# Altium PCB Soil_EH_Comparator.PcbDoc
Units mil, origin at the board's own origin, x right, y up, seen from the top; angles counter-clockwise.
Board outline 3210 x 1995 mil, 2 copper layers (Top Layer, Bottom Layer); 68 components, 38 nets, 164 pads, 12 vias.
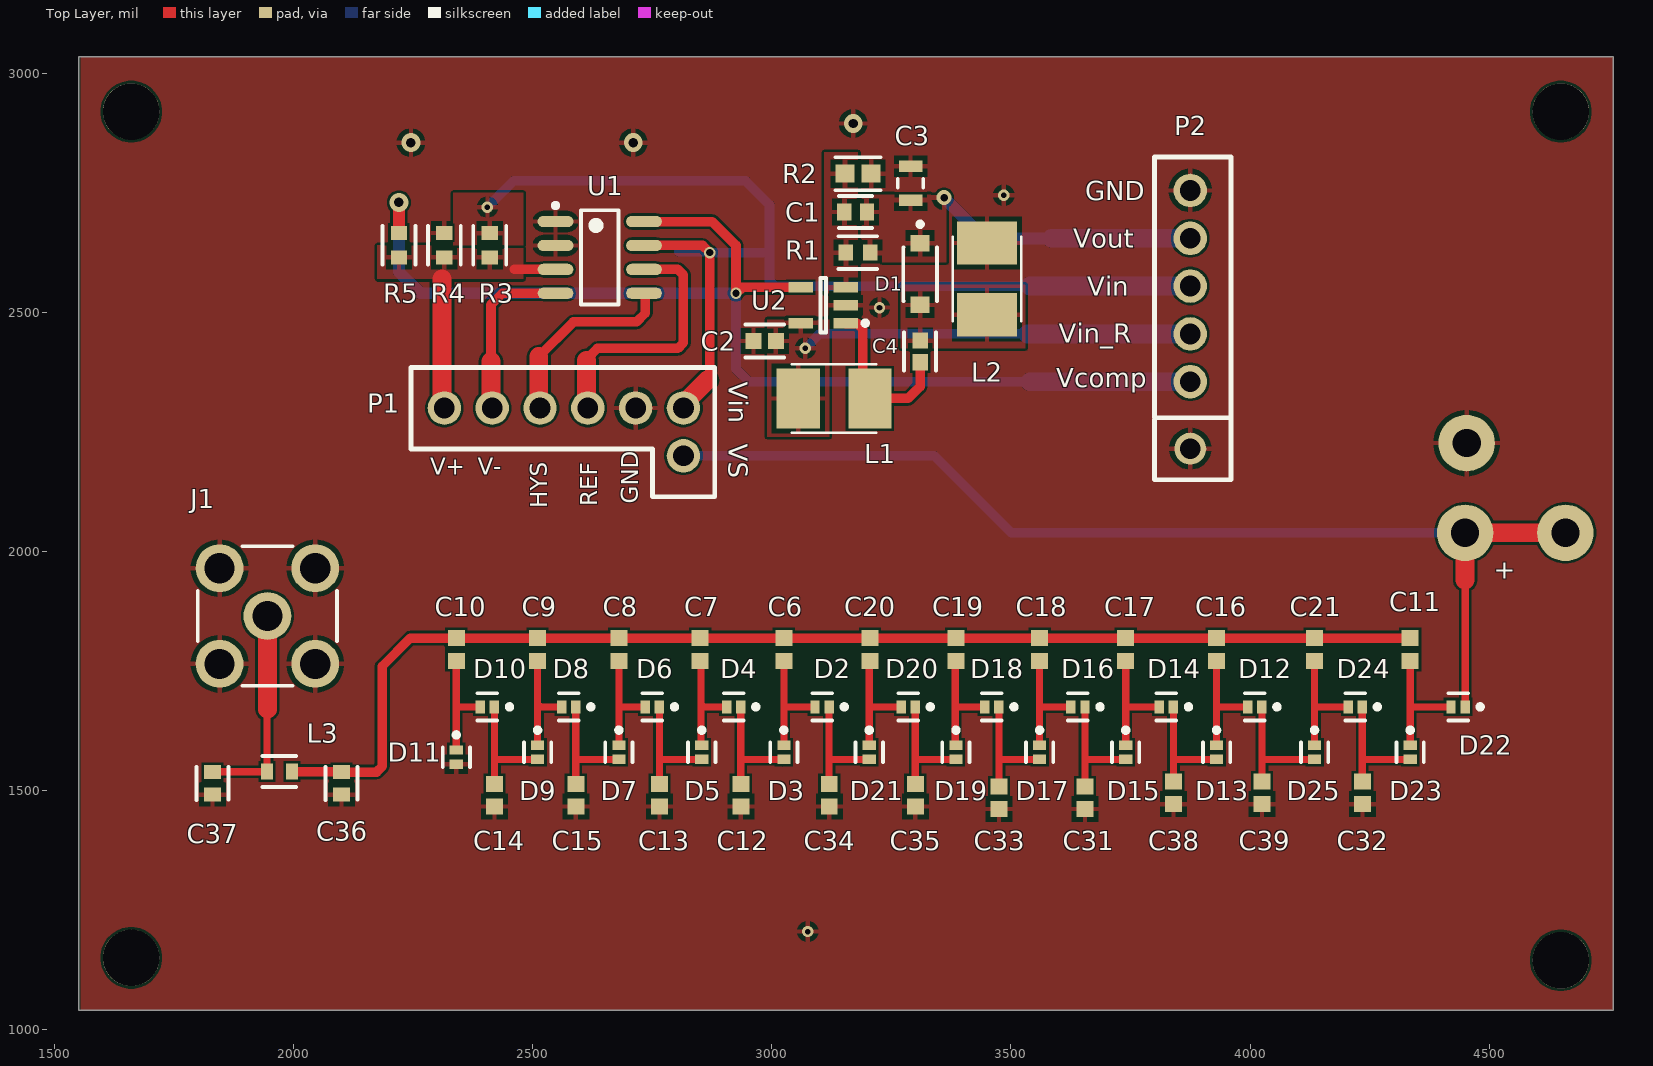
[diagram p0: Top Layer view]
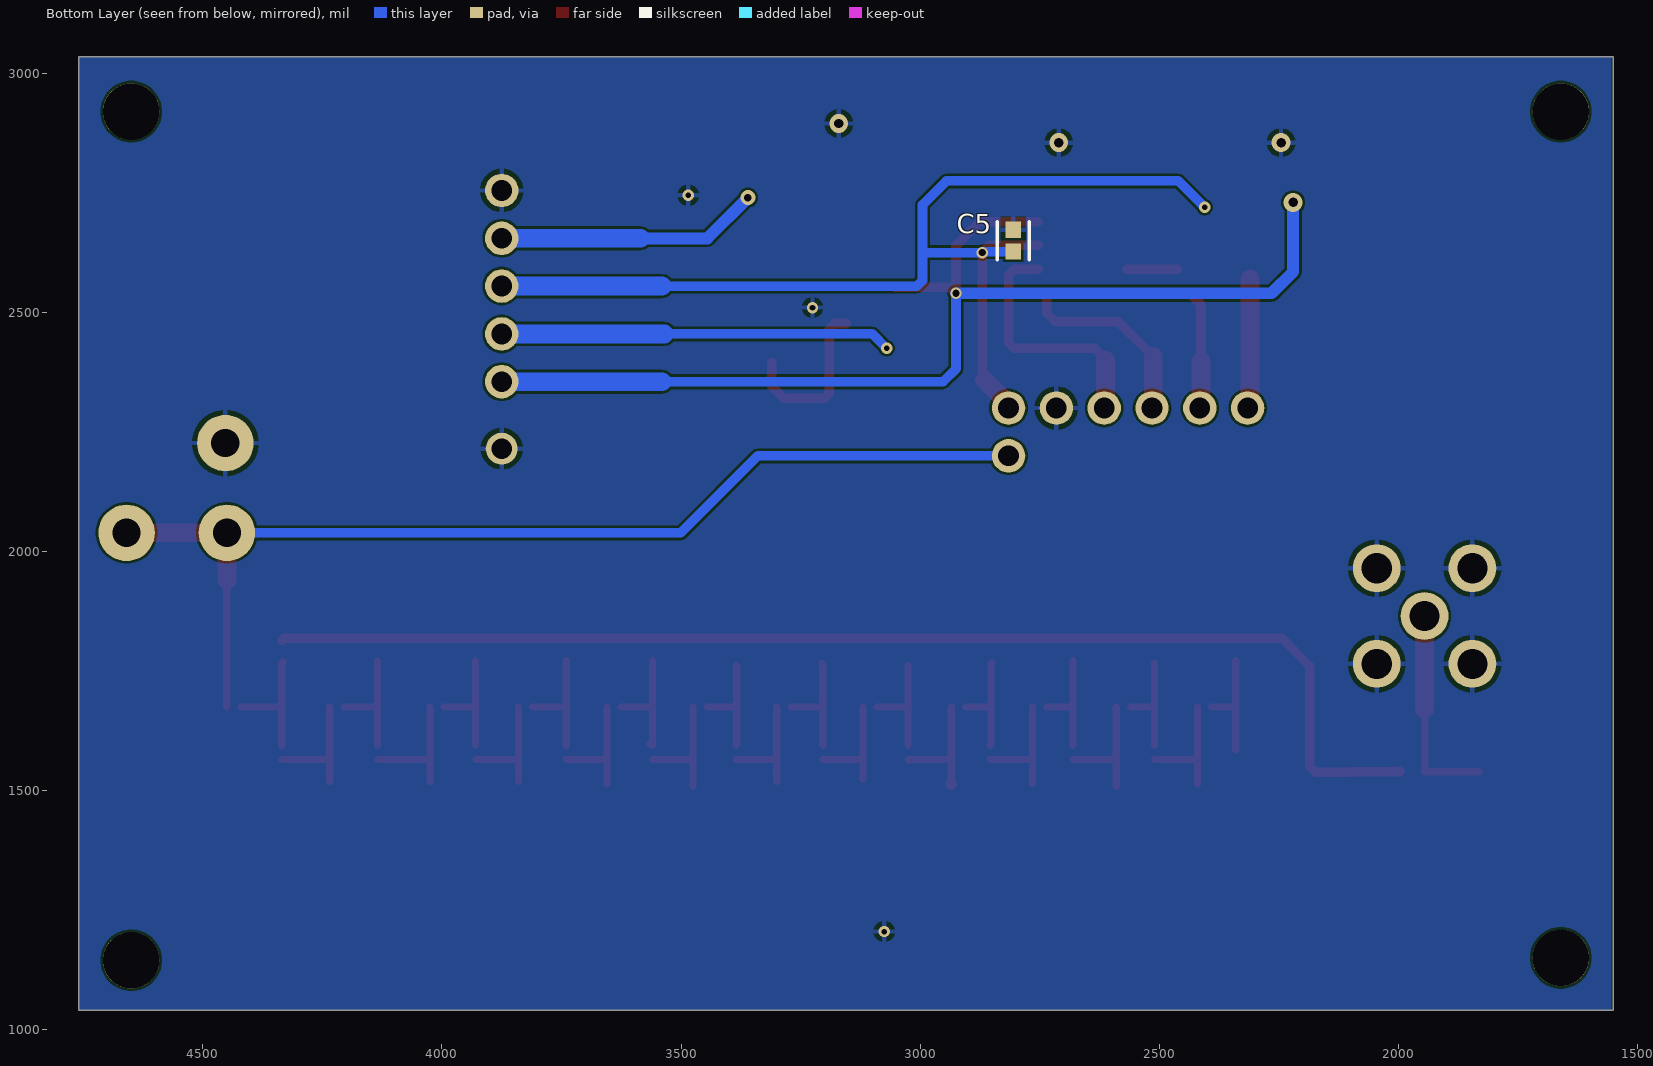
[diagram p1: Bottom Layer view, seen from below]
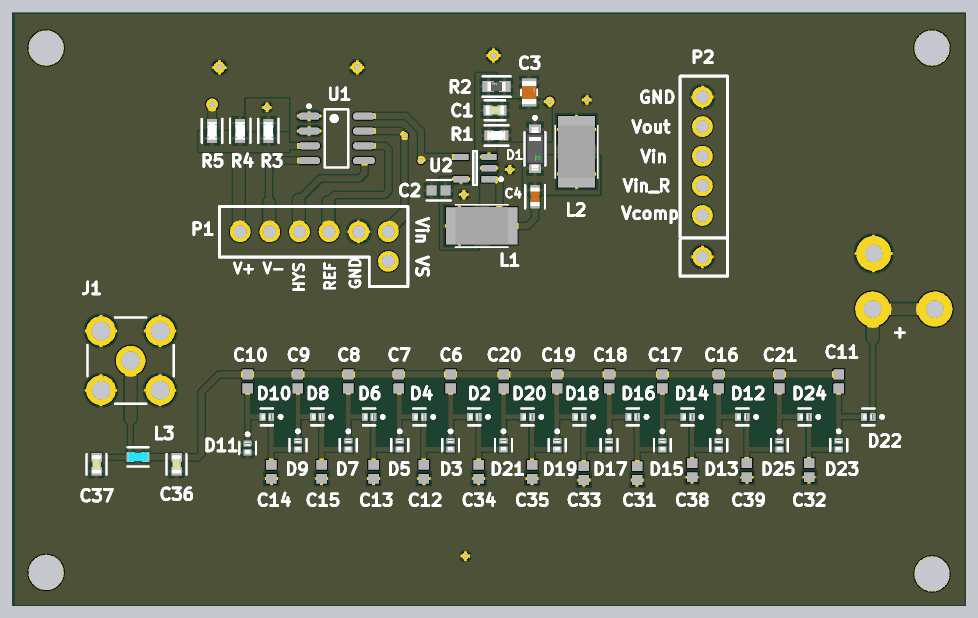
[diagram p2: 3D render of the assembled board from above, using the file's embedded part models]

## Layer stack, top to bottom
Top Solder: solder mask 0.4, Solder Resist, Dk 3.5
Top Layer: signal copper 1.4
Dielectric 1: dielectric 12.6, FR-4, Dk 4.8
Bottom Layer: signal copper 1.4
Bottom Solder: solder mask 0.4, Solder Resist, Dk 3.5

## Board outline
1550,1040 1550,3035 4760,3035 4760,1040

## Design rules (kind name [scope] priority, off if disabled: settings)
Clearance [All] p1: gap=5 ignorepadtopadclearanceinfootprint=TRUE except(0: Arc-Hole Track-Hole SMDPad-Hole THPad-Hole Via-Hole Fill-Hole Poly-Hole Region-Hole Text-Hole)
MinimumSolderMaskSliver [All] p1: minsoldermaskwidth=5
PolygonConnect [All] p1: connectstyle=Relief reliefconductorwidth=10 reliefentries=4 polygonreliefangle="90 Angle" airgapwidth=10
RoutingVias [All] p1: holewidth=28 width=50 viastyle="Through Hole" minholewidth=28 minwidth=50 maxholewidth=28 maxwidth=50
SilkToSilkClearance [All] p1: silktosilkclearance=5
SilkToSolderMaskClearance [IsPad] p1: minsilkscreentomaskgap=5 clearancetoexposedcopper=TRUE
SolderMaskExpansion [All] p1: expansion=4 istentingtop=FALSE
Width [All] p1: maxlimit=50 minlimit=10 preferedwidth=10
27 further rules are at their usual default settings.

## Components (designator, comment, footprint, x,y, rotation, side; value= is the part's Value field where it differs from the comment)
C1 "4.7pF" FP-C0603C-CF-MFG 3175,2710 r180 top value="4.7 pF"
C2 "4.7uF" FP-GRM188-0_15-IPC_C 2985,2440 r180 top
C3 "10uF" FP-GRM21B-0_1-MFG 3290,2770 r90 top
C4 "1uF" FP-0603-L_1_6_0_1-W_0_8_0-IPC_C 3310,2418.33 r90 top
C5 "1uF" FP-0603-L_1_6_0_1-W_0_8_0-IPC_C 2805,2650 r90 bottom
C6 "47pF" CAPC1608X95X40LL15T15 3025,1795 r270 top
C7 "47pF" CAPC1608X95X40LL15T15 2850,1795 r270 top
C8 "47pF" CAPC1608X95X40LL15T15 2680,1795 r270 top
C9 "47pF" CAPC1608X95X40LL15T15 2510,1795 r270 top
C10 "47pF" CAPC1608X95X40LL15T15 2340,1795 r270 top
C11 "47pF" CAPC1608X95X40LL15T15 4335,1795 r270 top
C12 "47pF" CAPC1608X95X40LL15T15 2935,1490 r90 top
C13 "47pF" CAPC1608X95X40LL15T15 2765,1490 r90 top
C14 "47pF" CAPC1608X95X40LL15T15 2420,1490 r90 top
C15 "47pF" CAPC1608X95X40LL15T15 2590,1490 r90 top
C16 "47pF" CAPC1608X95X40LL15T15 3930,1795 r270 top
C17 "47pF" CAPC1608X95X40LL15T15 3740,1795 r270 top
C18 "47pF" CAPC1608X95X40LL15T15 3560,1795 r270 top
C19 "47pF" CAPC1608X95X40LL15T15 3385,1795 r270 top
C20 "47pF" CAPC1608X95X40LL15T15 3205,1795 r270 top
C21 "47pF" CAPC1608X95X40LL15T15 4135,1795 r270 top
C31 "47pF" CAPC1608X95X40LL15T15 3655,1485 r90 top
C32 "47pF" CAPC1608X95X40LL15T15 4235,1495 r90 top
C33 "47pF" CAPC1608X95X40LL15T15 3475,1485 r90 top
C34 "47pF" CAPC1608X95X40LL15T15 3120,1490 r90 top
C35 "47pF" CAPC1608X95X40LL15T15 3300,1490 r90 top
C36 "33pF" FP-C0603C-CF-MFG 2100,1515 r270 top value="33 pF"
C37 "33pF" FP-C0603C-CF-MFG 1830,1515 r270 top value="33 pF"
C38 "47pF" CAPC1608X95X40LL15T15 3840,1495 r90 top
C39 "47pF" CAPC1608X95X40LL15T15 4025,1495 r90 top
D1 "MBR0520L" FP-MA02A-MFG 3310,2580 r270 top
D2 "CDBQR0130L" FP-0402-SOD-923F-MFG 3105,1675 r180 top
D3 "CDBQR0130L" FP-0402-SOD-923F-MFG 3025,1580 r270 top
D4 "CDBQR0130L" FP-0402-SOD-923F-MFG 2920,1675 r180 top
D5 "CDBQR0130L" FP-0402-SOD-923F-MFG 2853.36,1580 r270 top
D6 "CDBQR0130L" FP-0402-SOD-923F-MFG 2750,1675 r180 top
D7 "CDBQR0130L" FP-0402-SOD-923F-MFG 2680,1580 r270 top
D8 "CDBQR0130L" FP-0402-SOD-923F-MFG 2575,1675 r180 top
D9 "CDBQR0130L" FP-0402-SOD-923F-MFG 2510,1580 r270 top
D10 "CDBQR0130L" FP-0402-SOD-923F-MFG 2405,1675 r180 top
D11 "CDBQR0130L" FP-0402-SOD-923F-MFG 2340,1570 r270 top
D12 "CDBQR0130L" FP-0402-SOD-923F-MFG 4010,1675 r180 top
D13 "CDBQR0130L" FP-0402-SOD-923F-MFG 3930,1580 r270 top
D14 "CDBQR0130L" FP-0402-SOD-923F-MFG 3825,1675 r180 top
D15 "CDBQR0130L" FP-0402-SOD-923F-MFG 3740,1580 r270 top
D16 "CDBQR0130L" FP-0402-SOD-923F-MFG 3640,1675 r180 top
D17 "CDBQR0130L" FP-0402-SOD-923F-MFG 3560,1580 r270 top
D18 "CDBQR0130L" FP-0402-SOD-923F-MFG 3459.97,1675 r180 top
D19 "CDBQR0130L" FP-0402-SOD-923F-MFG 3385,1580 r270 top
D20 "CDBQR0130L" FP-0402-SOD-923F-MFG 3285,1675 r180 top
D21 "CDBQR0130L" FP-0402-SOD-923F-MFG 3203.59,1580 r270 top
D22 "CDBQR0130L" FP-0402-SOD-923F-MFG 4435,1675 r180 top
D23 "CDBQR0130L" FP-0402-SOD-923F-MFG 4335,1580 r270 top
D24 "CDBQR0130L" FP-0402-SOD-923F-MFG 4220,1675 r180 top
D25 "CDBQR0130L" FP-0402-SOD-923F-MFG 4135,1580 r270 top
J1 "CONREVSMA001" CON-REVSMA 1945,1865 r0 top
L1 "Inductor" IND_LQH43CN100K03L 3130,2320 r0 top value=10u
L2 "Inductor" IND_LQH43CN100K03L 3450,2570 r90 top value=10u
L3 "6.8nH" FP-LQW18AN_00-MFG 1970,1540 r0 top
P1 "6:1 PINS" "6:1 pins" 2490.57,2229.52 r0 top
P2 "5" 5 3809.52,2464.43 r270 top
R1 "1M" FP-ERJ3EK-IPC_C 3180,2625 r0 top
R2 "604K" FP-RMCF0603-IPC_B 3180.1,2790 r180 top
R3 "1M" FP-ERJ3EK-IPC_C 2410,2640.52 r90 top
R4 "1M" FP-ERJ3EK-IPC_C 2315,2640.52 r270 top
R5 "1M" FP-ERJ3EK-IPC_C 2220,2640.52 r270 top
U1 "LTC1540IS8#PBF" LT-S8_L 2640,2615 r0 top
U2 "LT1615ES5#TRPBF" LT-S5-5-TSOT-23_N 3107.5,2515 r180 top

## Footprints (in the part's own frame and the unit in brackets; to place one, negate y for a bottom-side part, rotate by r counter-clockwise, add the part's x,y. Pads: shape width x height; smd on the part's side, far side on the other; paste and mask are expansions set on the pad)
5 [mil]
  round 70 hole 43.31 mask+2.5: 1(-290.57,65.48) 2(-190.57,65.48) 3(-90.57,65.48) 4(9.43,65.48) 5(109.43,65.48)
  silkscreen extent -361,-10 185,150
"6:1 pins" [mil]
  round 70 hole 43.31 mask+2.5: 1(-175.57,70.48) 2(-75.57,70.48) 3(24.43,70.48) 4(124.43,70.48) 5(224.43,70.48) 6(324.43,70.48) 7(324.43,-29.52)
  silkscreen extent -246,-115 390,155
CAPC1608X95X40LL15T15 [mm] "Chip Capacitor, 2-Leads, Body 1.60x0.80mm, IPC High Density"
  rect 0.85x0.9 smd: 1(-0.6,0) 2(0.6,0)
  body extent -0.87,-0.48 0.88,0.48, height 0.95
CON-REVSMA [mil] "Connector, RP-SMA Female, 5-Lead, Thru-Hole, Straight, Body 7x7mm"
  round 100 hole 63: 1(0,0) 2(-100,100) 3(100,100) 4(100,-100) 5(-100,-100)
  silkscreen extent -146,-146 146,146
FP-0402-SOD-923F-MFG [mm]
  rect 0.5x0.7 smd paste+0 mask+0: 1(-0.375,0) 2(0.375,0)
  silkscreen extent -1.3,-0.72 0.53,0.72, body extent -0.72,-0.45 0.72,0.45, height 0.25
FP-0603-L_1_6_0_1-W_0_8_0-IPC_C [mil]
  rect 33.77x31.97 smd paste+0 mask+0: 1(-22.72,0) 2(22.72,0)
  silkscreen extent -40,-33 40,33, body extent -44,-22 44,22, height 10
FP-C0603C-CF-MFG [mm]
  rect 0.75x0.9 smd paste+0 mask+0: 1(-0.6,0) 2(0.6,0)
  silkscreen extent -0.87,-0.85 0.88,0.85, body extent -1.2,-0.6 1.2,0.6, height 0.25
FP-ERJ3EK-IPC_C [mil]
  rect 29.78x33.94 smd paste+0 mask+0: 1(-25.62,0) 2(25.62,0)
  silkscreen extent -41,-34 41,34, body extent -44,-23 44,23, height 10
FP-GRM21B-0_1-MFG [mm]
  rect 0.6x1.25 smd paste+0 mask+0: 1(-0.9,0) 2(0.9,0)
  silkscreen extent -0.23,-0.67 0.23,0.67, body extent -1.3,-0.77 1.3,0.77, height 0.25
FP-GRM188-0_15-IPC_C [mil]
  rect 33.71x33.79 smd paste+0 mask+0: 1(-23.66,0) 2(23.66,0)
  silkscreen extent -41,-34 41,34
FP-LQW18AN_00-MFG [mm]
  rect 0.625x0.85 smd paste+0 mask+0: 1(-0.663,0) 2(0.663,0)
  silkscreen extent -0.9,-0.82 0.9,0.82, body extent -1.07,-0.6 1.07,0.6, height 0.25
FP-MA02A-MFG [mm]
  rect 0.88x1.02 smd paste+0 mask+0: 1(-1.635,0) 2(1.635,0)
  silkscreen extent -2.77,-0.9 1.43,0.9, body extent -2.17,-1 2.17,1, height 0.25
FP-RMCF0603-IPC_B [mil]
  rect 39.61x37.73 smd paste+0 mask+0: 1(-27.6,0) 2(27.6,0)
  silkscreen extent -47,-35 47,35, body extent -57,-29 57,29, height 10
IND_LQH43CN100K03L [mm]
  rect 2.3x3.175 smd: 1(-1.905,0) 2(1.905,0)
  silkscreen extent -2.25,-1.82 2.25,1.82, body extent -2.25,-1.6 2.25,1.6, height 2.8
LT-S5-5-TSOT-23_N [mm] "SOT23, 5-Leads, Body 2.90x1.63mm, Pitch 0.95mm, IPC Medium Density"
  rect 1.3x0.55 smd: 1(-1.2,0.95) 2(-1.2,0) 3(-1.2,-0.95) 4(1.2,-0.95) 5(1.2,0.95)
  silkscreen extent -2.35,-1.45 0.15,1.45, body extent -0.87,-1.45 0.87,1.45, height 1
LT-S8_L [mm] "SOP, 8-Leads, Body 4.9x3.9mm, Pitch 1.27mm, IPC High Density"
  oval 1.9x0.6 smd: 1(-2.35,1.905) 2(-2.35,0.635) 3(-2.35,-0.635) 4(-2.35,-1.905) 5(2.35,-1.905) 6(2.35,-0.635) 7(2.35,0.635) 8(2.35,1.905)
  silkscreen extent -2.47,-2.5 1,2.88, body extent -2,-2.5 2,2.5, height 1.76

## Part data
C1: library part CMP-03020-018749-1, "CAP CER 4.7PF 25V C0G/NP0 0603", Capacitance="4.7 pF", Manufacturer=KEMET, Manufacturer Part Number=C0603C479C3GACAUTO, Package=C0603C-CF, Temperature="-55°C to +125°C", Temperature Characteristic=C0G, Temperature Coefficient=30ppm/°C, Temperature Range High=+125°C, Temperature Range Low=-55°C, Tolerance="0.25 pF", Voltage Rating="25 V", Automotive=Yes, Automotive Grade="Grade 1", Category=Cap, ComponentLink2Description=Datasheet, ComponentLink2URL=https://api.kemet.com/component-edge/download/datasheet/C0603C100J5GACAUTO.pdf, Device Class L1="Passive Components", Device Class L2=Capacitors, Device Class L3="Ceramic Capacitors", Digikey Description="CAP CER 4.7PF 25V C0G/NP0 0603", Height=0.87mm, Lead Free=Yes, Material=Ceramic, Octopart=https://octopart.com/c0603c479c3gacauto-kemet-21768564, RoHS=TRUE
C2: library part CMP-2006-02523-2, "Chip Multilayer Ceramic Capacitors for General Purpose, 0603, 4.7uF, X5R, 15%, 10%, 25V", Case Code (Imperial)=0603, Case Code (Metric)=1608, Dielectric=X5R, Max Operating Temperature=85°C, Min Operating Temperature=-55°C, Package Quantity=4000, Tolerance=10%, Voltage=25V, Capacitance=4.7uF, Case/Package=0603, Depth=0.8mm, Height=0.8mm, Lead Free="Lead Free", Length=1.6mm, Material=Ceramic, Mount="Surface Mount", Packaging="Cut Tape", REACH SVHC="No SVHC", Thickness=0.031inch, Voltage Rating=25V, Voltage Rating (DC)=25V, Width=0.031inch
C3: library part CMP-2007-03534-2, "Chip Multilayer Ceramic Capacitors for General Purpose, 0805, 10uF, X5R, 15%, 10%, 16V", Case Code (Imperial)=0805, Case Code (Metric)=2012, Dielectric=X5R, Max Operating Temperature=85°C, Min Operating Temperature=-55°C, Package Quantity=10000, Tolerance=10%, Voltage=16V, Capacitance=10uF, Case/Package=0805, Depth=1.25mm, Height=1.25mm, Length=2mm, Mount="Surface Mount", Packaging="Tape and Reel", Radiation Hardening=No, REACH SVHC="No SVHC", Termination=SMD/SMT, Thickness=0.053inch, Voltage Rating=16V, Voltage Rating (DC)=16V, Width=0.049inch
C4 C5: library part CMP-14477-000018-3, "None", Case Code (Imperial)=0603, Case Code (Metric)=1608, Dielectric=X7R, Max Operating Temperature=125°C, Min Operating Temperature=-55°C, Package Quantity=1, Resistor Type=Ceramic, Tolerance=10%, Voltage Rating=16V, Capacitance=1uF, Case/Package=0603, Construction=Flat, Contact Plating=Nickel, Depth=0.8mm, Halogen Free="Halogen Free", Height=0.8mm, Lead Free="Lead Free", Length=1.6mm, Mount="Surface Mount", Number of Pins=2, Packaging="Tape and Reel", Radiation Hardening=No, REACH SVHC="No SVHC", RoHS Compliant=Yes, Series=M, Termination=SMD/SMT, Thickness=0.035inch, Voltage Rating (DC)=16V, Width=0.031inch
C6 C7 C8 C9 C10 C11 C12 C13 C14 C15 C16 C17 C18 C19 C20 C21 C31 C32 C33 C34 C35 C38 C39: library part CMP-2006-01548-1, Manufacturer=Vitramon, Part Number=VJ0603A470FXACW1BC
C36 C37: library part CMP-2006-03463-2, "CAP CER 33PF 50V 1% NP0 0603", Capacitance="33 pF", Manufacturer=KEMET, Manufacturer Part Number=C0603C330F5GACTU, Package=C0603C-CF, Temperature="-55°C to +125°C", Temperature Characteristic=C0G, Temperature Coefficient=30ppm/°C, Temperature Range High=+125°C, Temperature Range Low=-55°C, Tolerance=0.01, Voltage Rating="50 V", Automotive=Yes, Automotive Grade="Grade 1", Category=Cap, ComponentLink2Description=Datasheet, ComponentLink2URL=https://api.kemet.com/component-edge/download/datasheet/C0603C100J5GACAUTO.pdf, Device Class L1="Passive Components", Device Class L2=Capacitors, Device Class L3="Ceramic Capacitors", Digikey Description="CAP CER 33PF 50V 1% NP0 0603", Height=0.87mm, Lead Free=Yes, Material=Ceramic, Mouser Description="Multilayer Ceramic Capacitors MLCC - SMD/SMT 50volts 33pF C0G 1%", Octopart=https://octopart.com/c0603c330f5gactu-kemet-9143758, RoHS=TRUE
D1: library part CMP-2000-04926-2, "DIODE SCHOTTKY 20V 500MA SOD123", Average Rectified Current=500mA, Capacitance=4pF, Current Rating=500A, Forward Voltage=385mV, Max Forward Surge Current (Ifsm)=5.5A, Max Operating Temperature=125°C, Max Repetitive Reverse Voltage (Vrrm)=20V, Max Reverse Leakage Current=250uA, Min Operating Temperature=-65°C, Package Quantity=3000, Power Dissipation=400mW, Element Configuration=Single, Forward Current=500mA, Height=1.03mm, Lead Free="Lead Free", Length=2.7mm, Max Reverse Voltage (DC)=20V, Max Surge Current=5.5A, Mount="Surface Mount", Number of Pins=2, Output Current=500mA, Packaging="Tape and Reel", Peak Non-Repetitive Surge Current=5.5A, Peak Reverse Current=250uA, Polarity=Standard, Radiation Hardening=No, REACH SVHC="No SVHC", Voltage Rating (DC)=20V, Weight=0.03g, Width=1.6mm
D2 D3 D4 D5 D6 D7 D8 D9 D10 D11 D12 D13 D14 D15 D16 D17 D18 D19 D20 D21 D22 D23 D24 D25: library part CMP-20227-000005-1, "DIODE SCHOTTKY 30V 100MA 0402", Average Rectified Current=100mA, Case Code (Imperial)=0402, Case Code (Metric)=1005, Max Reverse Leakage Current=10uA, Max Reverse Voltage (DC)=30V, Max Surge Current=1A, Package Quantity=1, Case/Package=0402, Mount="Surface Mount", Packaging="Tape and Reel"
J1: library part CMP-0168-00008-1, "RP-SMA Female PCB Mount Connector, Thru-Hole", DatasheetVersion="rev1.0, Mar-2005", PackageDescription="RP-SMA Female PCB Mount Connector, Thru-Hole, 7 x 7 mm Body", PackageReference=CON-REVSMA, PackageVersion="rev1.0, Mar-2005"
L3: library part CMP-06042-000801-1, "Wire Wound RF Inductor 6.8nH ±0.5nH 750mA 0.082Ω 0603 (1608)", Case Code (Imperial)=0603, Case Code (Metric)=1608, Current Rating=750mA, DC Resistance (DCR)=82mR, Max Operating Temperature=125°C, Min Operating Temperature=-55°C, Package Quantity=4000, Resistor Type=Wirewound, Self Resonant Frequency=6GHz, Test Frequency=100MHz, Case/Package=0603, Core Material=Non-Magnetic, DC Current=750mA, Depth=1mm, Height=0.8mm, Height - Seated (Max)=0.039inch, Inductance=6.8nH, Lead Free="Lead Free", Length=1.6mm, Max DC Current=750mA, Military Standard=Not, Mount="Surface Mount", Packaging="Tape and Reel", Q Factor=35, Radiation Hardening=No, Series Resistance=82mR, Shielding=Unshielded, Termination=SMD/SMT, Weight=0.000106oz, Width=0.031inch
R1 R3 R4 R5: library part CMP-1012-00849-3, "RES SMD 1M OHM 1% 1/10W 0603", Case Code (Imperial)=0603, Case Code (Metric)=1608, Max Operating Temperature=155°C, Max Power Dissipation=100mW, Min Operating Temperature=-55°C, Package Quantity=1, Resistance=1MR, Resistance Tolerance=1%, Resistor Type="Thick Film", Temperature Coefficient=100ppm/°C, Voltage Rating=75V, Case/Package=0603, Construction=Rectangular, Contact Plating=Tin, Depth=0.8mm, Features="Automotive AEC-Q200", Height=0.022inch, Lead Free="Lead Free", Length=1.6mm, Military Standard=Not, Mount="Surface Mount", Number of Pins=2, Number of Terminations=2, Packaging="Tape and Reel", Power Rating=100mW, Radiation Hardening=No, REACH SVHC="No SVHC", RoHS Compliant=Yes, Series=ERJ, Size Code=0603, Termination=SMD/SMT, Tolerance=1%, Voltage Rating (DC)=75V, Width=0.8mm
R2: library part CMP-26527-005269-1, "604kΩ ±1% 0.1W 0603 Thick Film Chip Resistor AEC-Q200 compliant", Case Code (Imperial)=0603, Case Code (Metric)=1608, Max Operating Temperature=155°C, Max Power Dissipation=100mW, Min Operating Temperature=-55°C, Package Quantity=5000, Resistance=604kR, Resistor Type="Thick Film", Temperature Coefficient=100ppm/°C, Tolerance=1%, Case/Package=0603, Construction=Rectangular, Contact Plating=Tin, Depth=0.8mm, Features="Automotive AEC-Q200", Height=0.022inch, Lead Free="Lead Free", Length=0.061inch, Military Standard=Not, Mount="Surface Mount", Number of Terminations=2, Packaging="Tape and Reel", Radiation Hardening=No, RoHS Compliant=Yes, Series=RMCF, Width=0.031inch
U1: library part CMP-0360-00613-3, "Nanopower Comparator with Reference, 1 Channel, 2 to 11 V, -40 to +85 degC, 8-pin SOP (S8)", Generic Part Number=LTC1540, Manufacturer="Linear Technology", Supply Current (uA) Guaranteed=0.68, Supply Current (uA) Typical=0.3, Supply Voltage Range="2 to 11 V", Channels (#)=1, ComponentLink1Description="Manufacturer URL", ComponentLink1URL=http://www.linear.com/, ComponentLink2Description=Datasheet, ComponentLink2URL=http://cds.linear.com/docs/en/datasheet/1540fas.pdf, ComponentLink3Description="Package Specification", ComponentLink3URL=http://cds.linear.com/docs/en/packaging/05081610_G_SO8.pdf, DatasheetVersion="Rev A", Features="Reference, Comparator", Mounting Technology="Surface Mount", PackageDescription="8-Pin Plastic Small Outline (Narrow .150 Inch), Body 4.9 x 3.9 mm, Pitch 1.27 mm", PackageReference=S8, PartNumber=LTC1540IS8#PBF, Prop Delay (us)=50, RoHS=Y, Vos (mV) Guaranteed=12, Vos (mV) Typical=12, Vs Max (V)=11, Vs Min (V)=2
U2: library part CMP-0491-01542-1, "Micropower Step-Up DC/DC Converter, 5-pin SOT23 (S5-5), -40 to 85 degC, Pb-Free, Tape and Reel", Manufacturer="Linear Technology", Code_JEDEC=MO-193, ComponentLink1Description="Manufacturer URL", ComponentLink1URL=http://www.linear.com/, ComponentLink2Description=Datasheet, ComponentLink2URL=http://cds.linear.com/docs/en/datasheet/16151fas.pdf, ComponentLink3Description="Package Specification", ComponentLink3URL=http://cds.linear.com/docs/en/packaging/SOT_5_05-08-1635.pdf, Mounting Technology="Surface Mount", Number of Outputs=1, PackageDescription="5-Pin Plastic TSOT-23, Body 1.63 x 2.90 mm, Pitch 0.95 mm", PackageReference=S5-5, PackageVersion=Jun-10, Packing="Tape and Reel", PartNumber=LT1615ES5#TRPBF, RoHS=TRUE
L1 L2: SimulationGenericComponent=True

## Free pads (board coordinates)
  round 118.11 hole 118.11: 6(1660,2920) 7(4650,2920) 8(4650,1145) 9(1660,1150)
  round 118.11 hole 59.06: 11(4449.71,2038.96) 11(4659.71,2038.96) 13(4453.05,2226.76)
  round 66.93 hole 43.31: 12(3875,2215)

## Via types
v1: diameter 23.62, hole 11.81, Top Layer to Bottom Layer, 5 vias
v2: diameter 39.37, hole 19.68, Top Layer to Bottom Layer, 4 vias
v3: diameter 23.62, hole 15, Top Layer to Bottom Layer, 2 vias
v4: diameter 31.5, hole 15.75, Top Layer to Bottom Layer, 1 vias

## Nets (pads, with @x,y where several pads share a name; then routed paths per layer and width w, separated by ;. In a path a pad name is that pad's centre, name@x,y a point inside that pad or via, vN(x,y) a via of type N, cw(c..) or ccw(c..) an arc to the next point about the centre after c; other vN are vias at no path point)
FB: C1.2 R1.1 R2.2 U2.3 | length 8.9
  Top Layer w10: U2.3@3145.83,2552.4 U2.3
GND: C2.2 C3.2 C5.2 C12.1 C13.1 C14.1 C15.1 C31.1 C32.1 C33.1 C34.1 C35.1 C36.2 C37.2 C38.1 C39.1 D11.2 J1.2 J1.3 J1.4 J1.5 L2.2 P1.5 P2.1 pad.12 pad.13 R2.1 R4.1 U1.1 U1.2 U2.2
  other v1: 3075,1205 3225,2510 3485,2745
  other v2: 2245,2855 2710,2855 3170,2895
HYST: P1.3 U1.5 | length 408.9
  Top Layer w20: 2512.5,2407.5 2585,2480 2716.93,2480 2735.12,2498.19 U1.5@2735.12,2538.33
  Top Layer w39.37: 2512.5,2407.5 2512.5,2302.5 P1.3
NetC4_2: C4.2 D1.2 L2.1
NetC6_1: C6.1 C7.1 C8.1 C9.1 C10.1 C11.1 C16.1 C17.1 C18.1 C19.1 C20.1 C21.1 C36.1 L3.2 | length 2580.4
  Top Layer w20: L3.2 1996.77,1539.31 2099.31,1539.31 C36.1 2173.28,1538.62 2185,1550.34 2185,1760 2243.62,1818.62 C10.1 C9.1 C8.1 C7.1 C6.1 C20.1 C19.1 C18.1 C17.1 C16.1 C21.1 4330,1818.62 C11.1@4335,1813.62
NetC6_2: C6.2 D2.2 D3.1 | length 233.1
  Top Layer w15: D3.1 3025,1678.07 ; C6.2@3025,1761.38 3025,1678.07 ; D2.2 3028.07,1675 3025,1678.07
NetC7_2: C7.2 D4.2 D5.1 | length 229.1
  Top Layer w15: C7.2@2850,1766.38 2851.52,1764.86 2851.52,1680.73 ; D5.1 2851.52,1596.6 2851.52,1680.73 ; D4.2 2857.25,1675 2851.52,1680.73
NetC8_2: C8.2 D6.2 D7.1 | length 232.5
  Top Layer w15: D7.1 2680,1676.63 ; C8.2 2680,1676.63 ; D6.2 2681.63,1675 2680,1676.63
NetC9_2: C9.2 D8.2 D9.1 | length 224.2
  Top Layer w15: D9.1 2510,1680.57 ; C9.2@2510,1766.38 2510,1680.57 ; D8.2 2515.57,1675 2510,1680.57
NetC10_2: C10.2 D10.2 D11.1 | length 238.1
  Top Layer w15: D11.1 2340,1678.07 ; C10.2 2340,1678.07 ; D10.2 2343.07,1675 2340,1678.07
NetC11_2: C11.2 D22.2 D23.1 | length 262.5
  Top Layer w15: C11.2@4331.18,1770.2 4335,1766.38 4335,1675.54 ; D23.1 4335,1675.54 ; D22.2 4335.54,1675 4335,1675.54
NetC16_2: C16.2 D12.2 D13.1 | length 242
  Top Layer w15: D13.1 3930,1674.71 ; C16.2 3930,1674.71 ; D12.2 3930.29,1675 3930,1674.71
NetC17_2: C17.2 D14.2 D15.1 | length 246.9
  Top Layer w15: D15.1 3740,1675 ; C17.2 3740,1675 ; D14.2 3740,1675
NetC18_2: C18.2 D16.2 D17.1 | length 248.4
  Top Layer w15: C18.2 3560,1676.39 ; D17.1@3565,1597.11 3562.66,1594.76 D17.1 3560,1676.39 ; D16.2 3561.39,1675 3560,1676.39
NetC19_2: C19.2 D18.2 D19.1 | length 229.6
  Top Layer w15: D19.1 3383.59,1596.17 3383.59,1675.57 ; C19.2@3385,1761.38 3383.59,1759.97 3383.59,1675.57 ; D18.2 3384.16,1675 3383.59,1675.57
NetC20_2: C20.2 D20.2 D21.1 | length 239.2
  Top Layer w15: D21.1 3203.59,1679.18 ; C20.2@3205,1765 3203.59,1763.59 3203.59,1679.18 ; D20.2 3207.77,1675 3203.59,1679.18
NetC21_2: C21.2 D24.2 D25.1 | length 247.7
  Top Layer w15: D25.1 4135,1677.08 ; C21.2 4135,1677.08 ; D24.2 4137.08,1675 4135,1677.08
NetC37_1: C37.1 J1.1 L3.1 | length 442.1
  Top Layer w15: C37.1 1830.69,1539.31 1944.31,1539.31 1945,1540 L3.1 1943.92,1668.92 1945,1670
  Top Layer w39.37: 1945,1670 J1.1
REF: P1.4 U1.6 | length 529.3
  Top Layer w20: 2612.5,2399.52 2615,2402.02 2615,2405 2634.69,2424.69 2803.28,2424.69 2815,2436.41 2815,2578.28 2803.28,2590 U1.6@2752.52,2590
  Top Layer w39.37: 2612.5,2399.52 2612.5,2302.5 P1.4
SW: C4.1 L1.2 U2.1 | length 355.3
  Top Layer w20: U2.1@3154.74,2476.77 3178.28,2476.77 3190,2465.06 3190,2330 L1.2@3200,2320 ; L1.2 3285,2320 3310,2345 C4.1
V1_out: C14.2 D9.2 D10.1 | length 251.7
  Top Layer w15: C14.2@2419.76,1513.86 2419.76,1564.47 ; D10.1 2419.76,1564.47 ; D9.2 2420.53,1565.24 2419.76,1564.47
V2_out: C15.2 D7.2 D8.1 | length 257.2
  Top Layer w15: D8.1 2589.76,1564.17 ; C15.2@2590,1508.62 2589.76,1508.86 2589.76,1564.17 ; D7.2 2590.83,1565.24 2589.76,1564.17
V3_out: C13.2 D5.2 D6.1 | length 250.2
  Top Layer w15: D6.1 2764.88,1674.88 2764.88,1565.92 ; C13.2 2764.88,1513.74 2764.88,1565.92 ; D5.2 2765.56,1565.24 2764.88,1565.92
V4_out: C12.2 D3.2 D4.1 | length 256
  Top Layer w15: C12.2@2934.88,1513.74 2934.88,1568.24 ; D4.1@2934.88,1674.88 2934.88,1568.24 ; D3.2@3022.66,1562.89 D3.2 2937.89,1565.24 2934.88,1568.24
  Top Layer w25: C12.2@2934.88,1513.74 C12.2
V5_out: C34.2 D2.1 D21.2 | length 235.7
  Top Layer w15: D2.1 3119.76,1566.29 ; C34.2@3120,1523.62 3119.76,1523.86 3119.76,1566.29 ; D21.2 3120.82,1565.24 3119.76,1566.29
V6_out: C35.2 D19.2 D20.1 | length 241.7
  Top Layer w15: D20.1 3299.88,1674.88 3299.88,1565.5 ; C35.2@3300,1518.62 3299.88,1518.74 3299.88,1565.5 ; D19.2 3300.15,1565.24 3299.88,1565.5
V7_out: C33.2 D17.2 D18.1 | length 251.6
  Top Layer w15: D18.1 3474.87,1674.87 3474.87,1565.24 ; C33.2 3474.87,1508.75 3474.87,1565.24 ; D17.2 3474.87,1565.24
V8_out: C31.2 D15.2 D16.1 | length 247.1
  Top Layer w15: D16.1 3654.76,1566.18 ; C31.2@3655,1513.62 3654.76,1513.86 3654.76,1566.18 ; D15.2 3655.71,1565.24 3654.76,1566.18
V9_Out: C38.2 D13.2 D14.1 | length 246.9
  Top Layer w15: D14.1 3839.88,1674.88 3839.88,1565.97 ; C38.2 3839.88,1518.74 3839.88,1565.97 ; D13.2 3840.61,1565.24 3839.88,1565.97
V10_out: C39.2 D12.1 D25.2 | length 266.7
  Top Layer w15: D12.1 4024.88,1674.88 4024.88,1564.96 ; C39.2 4024.88,1518.74 4024.88,1564.96 ; D25.2 4025.16,1565.24 4024.88,1564.96
V11_out: C32.2 D23.2 D24.1 | length 256.8
  Top Layer w15: D24.1 4234.88,1674.88 4234.88,1564.79 ; C32.2 4234.88,1518.74 4234.88,1564.79 ; D23.2 4235.33,1565.24 4234.88,1564.79
V12_out: D22.1 P1.7 pad.11 | length 2275.2
  Top Layer w15: D22.1 4450,1675.24 4450,1940
  Top Layer w39.37: 4449.71,1940.29 4449.71,2038.96 pad.11@4659.71,2038.96
  Bottom Layer w20: P1.7 3340,2200 3501.04,2038.96 pad.11@4449.71,2038.96
V_minus: P1.2 U1.4 | length 382.1
  Top Layer w20: 2412.5,2397.5 2412.5,2516.26 2436.24,2540 U1.4 U1.4@2567.48,2540
  Top Layer w39.37: 2412.5,2397.5 2412.5,2302.5 P1.2
V_plus: P1.1 R3.1 R4.2 R5.2 U1.3 | length 378.5
  Top Layer w20: 2461.05,2590 U1.3 U1.3@2567.48,2590
  Top Layer w39.37: 2310,2570 2310,2305 P1.1
Vcomp: P2.5 R5.1 U1.8 U2.4 | length 2525.4
  Top Layer w10: U2.4@3051.8,2552.4 U2.4
  Top Layer w20: U1.8@2752.52,2690 2875,2690 2925,2640 v3(2925,2540) 2926.08,2540 2938.48,2552.4 U2.4@3051.8,2552.4
  Top Layer w25: R5.1 v2(2220,2730)
  Bottom Layer w20: v3(2925,2540) 2925,2381.72 2951.72,2355 3580,2355
  Bottom Layer w25: v2(2220,2730) 2220,2585 2265,2540 v3(2925,2540)
  Bottom Layer w39.37: 3540,2355 P2.5
Vin: C5.1 P1.6 P2.3 R3.2 U1.7 | length 2355.1
  Top Layer w20: U1.7@2752.52,2640 2855,2640 v3(2870,2625) 2870,2375
  Top Layer w39.37: P1.6 2815,2308.29 2865,2358.29
  Bottom Layer w20: v1(2405,2720) 2460,2775 2945,2775 2995,2725 2995,2625 2995,2566.72 3006.72,2555 3580,2555 ; C5.1 2866.64,2627.28 2868.92,2625 2989.85,2625
  Bottom Layer w39.37: 3540,2555 P2.3
Vin_R: C2.1 L1.1 P2.4 U2.5 | length 817.4
  Bottom Layer w20: v1(3070,2425) 3100,2455 3535,2455
  Bottom Layer w39.37: 3535,2455 3575,2455 P2.4
Vout: C1.1 C3.1 D1.1 P2.2 R1.2 | length 550.2
  Bottom Layer w25: v4(3360,2740) 3445,2655 3585,2655
  Bottom Layer w39.37: 3585,2655 P2.2

## Polygon pours and split planes (outlines as drawn)
GND on Top Layer "R2" (solid, remove dead copper, pour order 13): 1555,3035 1555,1040 4760,1040 4760,3035
NetC4_2 on Top Layer "NONET_L-01_P-001" (solid, pour order 0): 3270,2425 3530,2425 3530,2557.5 3270,2557.5
Vin on Top Layer "V_in" (solid, remove dead copper, pour order 1): 2480,2640 2480,2750 2333.92,2750 2333.92,2640
FB on Top Layer "FB" (solid, pour order 2): 3180,2540 3180,2835 3110,2835 3110,2540
Vout on Top Layer "V_out" (solid, pour order 3): 3365,2605 3180,2605 3180,2746.38 3365,2746.38
V_plus on Top Layer "V_plus" (solid, pour order 6): 2480,2570 2175,2570 2175,2640 2480,2640
Vin_R on Top Layer "Vin_R" (solid, pour order 10): 3120,2240 2990,2240 2990,2485 3120,2485
GND on Bottom Layer "NONET_L-01_P-001" (solid, remove dead copper, pour order 9): 1555,3035 1555,1040 4760,1040 4760,3035

## Silkscreen, mask and mechanical layers (free items; w line width, h text height)
Top Overlay:
  lines w10: 3800,2275 3800,2150 3848.75,2150 3906.25,2150 3960,2150 3960,2280
  text "GND" at 3655,2735 h40
  text "Vout" at 3630,2635 h40
  text "Vin" at 3660,2535 h40
  text "Vin_R" at 3600,2436.66 h40
  text "Vin" at 2910,2355 h40 r270
  text "Vcomp" at 3595,2343.33 h40
  text "VS" at 2910,2225 h40 r270
  text "V+" at 2285,2160 h35
  text "V-" at 2385,2160 h35
  text "GND" at 2720,2100 h35 r90
  text "REF" at 2635,2095 h35 r90
  text "HYS" at 2530,2090 h35 r90
  text "+" at 4510,1943.34 h40
Board_Outline:
  the board outline again, w10